# Altium PCB DSD_SDR_MainBoard_Single.PcbDoc
Units mm, origin at the board's own origin, x right, y up, seen from the top; angles counter-clockwise.
Board outline 82.81 x 31.5 mm, 2 copper layers (Top Layer, Bottom Layer), stack 1.669 mm thick; 8 components, 10 nets, 59 pads, 5 vias.
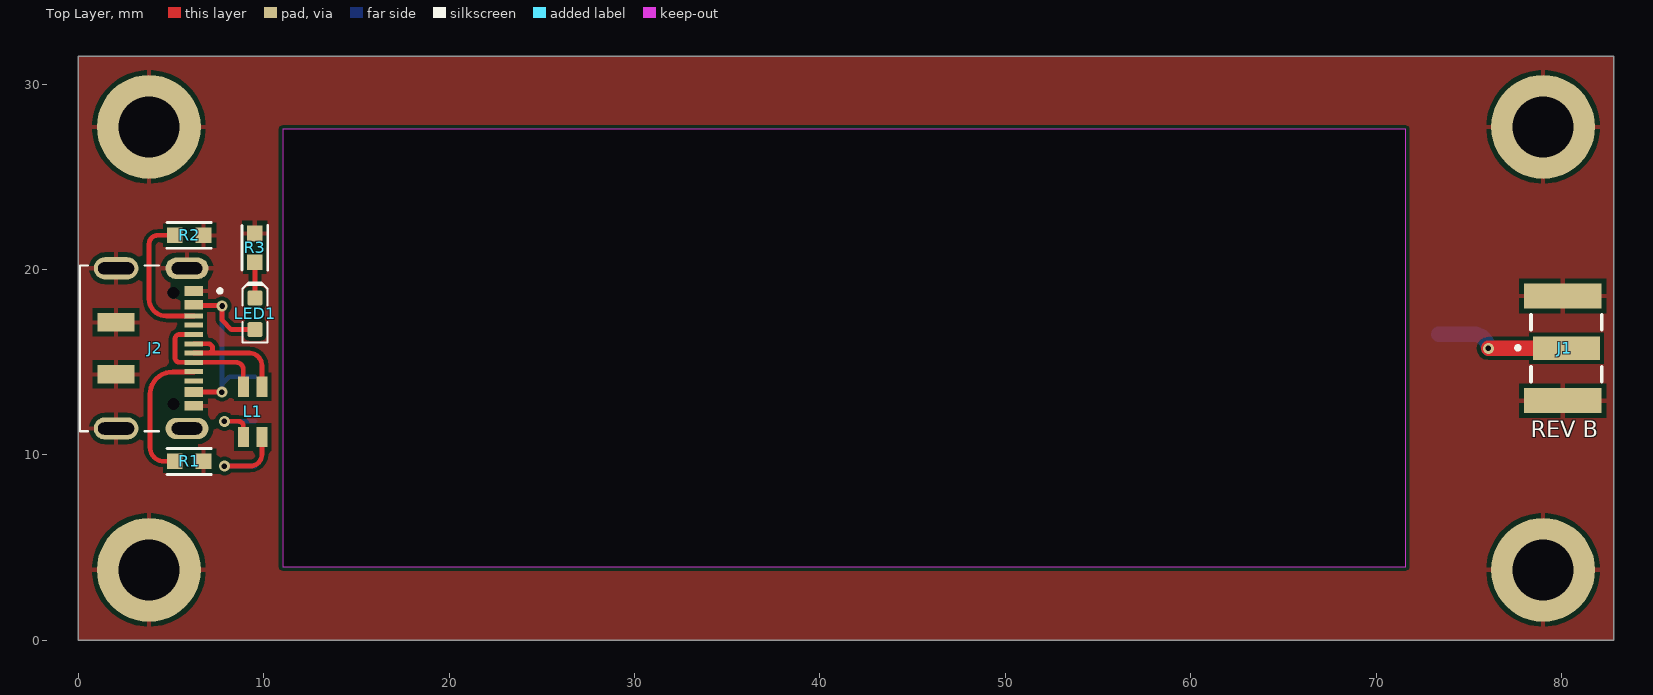
[diagram p0: Top Layer view]
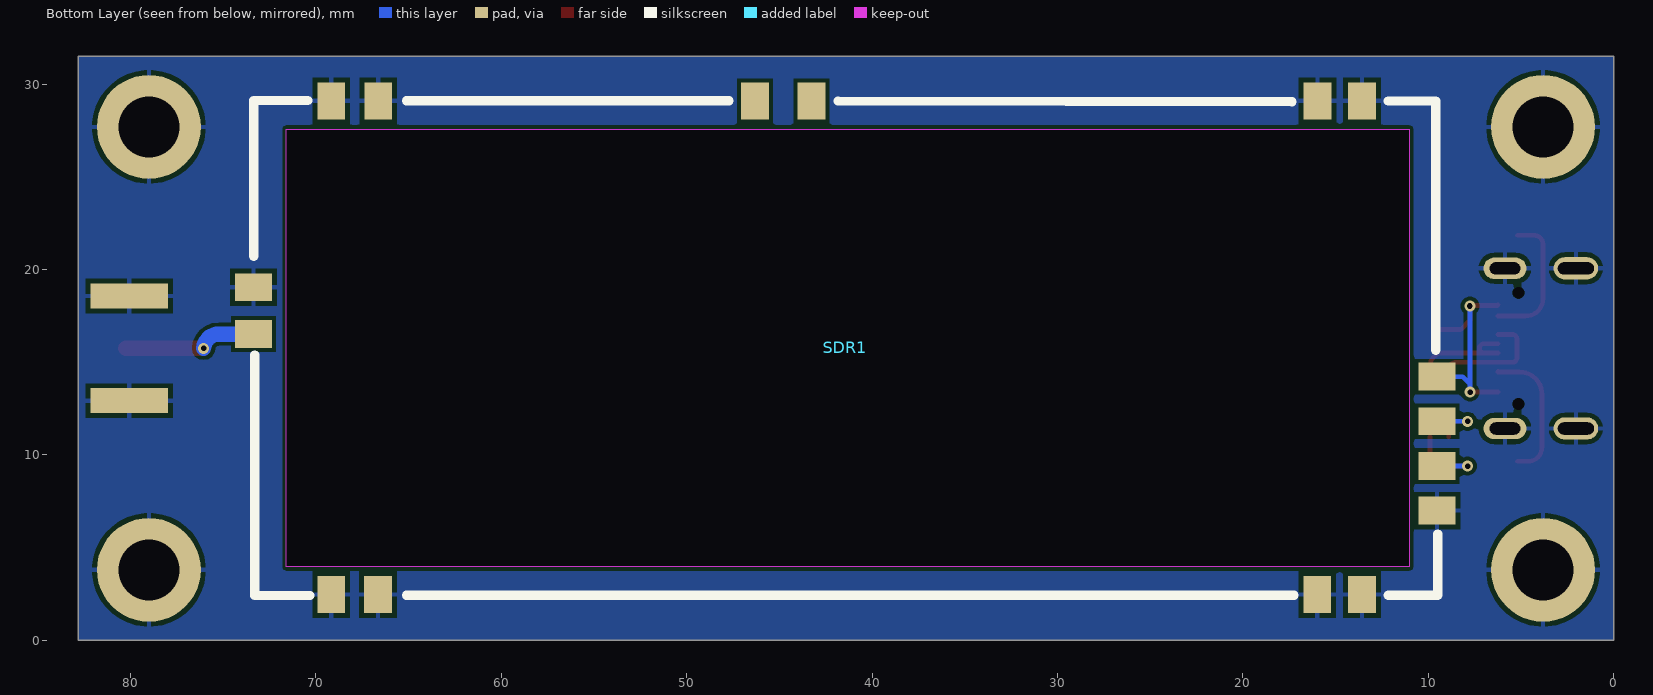
[diagram p1: Bottom Layer view, seen from below]
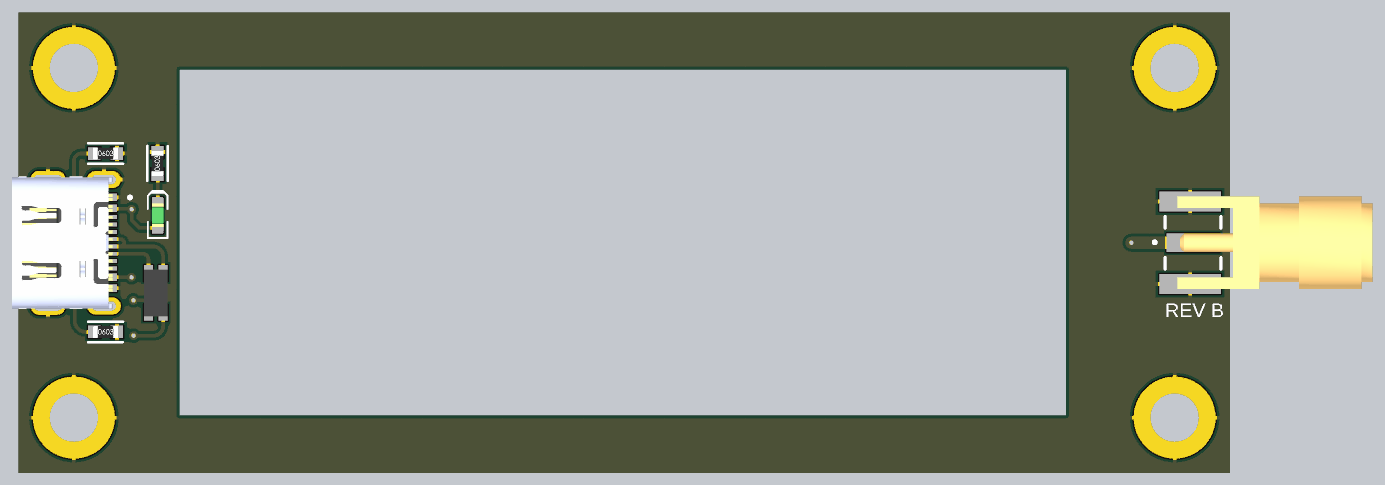
[diagram p2: 3D render of the assembled board from above, using the file's embedded part models]

## Layer stack, top to bottom
Top Solder: solder mask 0.0254, SM-001, Dk 4
Top Layer: signal copper 0.035
Dielectric 1: core 1.5986, Core-043, Dk 4.5
Bottom Layer: signal copper 0.035
Bottom Solder: solder mask 0.0254, SM-001, Dk 4

## Board outline
0,0 0,31.496 82.814,31.496 82.814,0

## Design rules (kind name [scope] priority, off if disabled: settings)
Clearance [All] p1: gap=0.2 ignorepadtopadclearanceinfootprint=FALSE except(0: Arc-Hole Track-Hole SMDPad-Hole THPad-Hole Via-Hole Fill-Hole Poly-Hole Region-Hole Text-Hole)
HoleSize [All] p1: absolutevalues=TRUE maxlimit=5 minlimit=0.025 maxpercent=80.000 minpercent=20.000
HoleToHoleClearance [All] p1: gap=0 allowstackedmicrovias=TRUE
MinimumSolderMaskSliver [All] p1: minsoldermaskwidth=0
PolygonConnect [All] p1: connectstyle=Relief reliefconductorwidth=0.254 reliefentries=4 polygonreliefangle="90 Angle" airgapwidth=0.254
RoutingVias [All] p1: holewidth=0.3 width=0.6 viastyle="Through Hole" minholewidth=0.3 minwidth=0.6 maxholewidth=4 maxwidth=6
SilkToSilkClearance [All] p1: silktosilkclearance=0
SilkToSolderMaskClearance [IsPad] p1: minsilkscreentomaskgap=0 clearancetoexposedcopper=TRUE
SolderMaskExpansion [All] p1: expansion=0.102 istentingtop=FALSE
SupplyNets "Schematic Supply Nets_1" [InNet('GND')] p1: voltage=0.000
SupplyNets "Schematic Supply Nets" [InNet('+5-USB')] p2: voltage=0.000
Width RF [InNet('RF')] p1: maxlimit=0.9 minlimit=0.826 preferedwidth=0.846 impedanceprofiledriven=TRUE impedanceprofileid={A931AD90-E5BE-4048-AE62-1A7E0EDC505E} impedanceprofilevalue=50.000000 minimp=50.000000 maximp=50.000000 favimp=50.000000
Width [All] p2: maxlimit=0.254 minlimit=0.254 preferedwidth=0.254
25 further rules are at their usual default settings.

## Components (designator, comment, footprint, x,y, rotation, side; value= is the part's Value field where it differs from the comment)
J1 "SMA-J-P-H-ST-EM1" SAMTEC_SMA-J-P-H-ST-EM1 80.274,15.748 r90 top locked
J2 "DX07S016JA1R1500" JAE_DX07S016JA1R1500 5.132,15.745 r270 top locked
L1 "90Ohm" WE-CNSW_1206 9.398,12.319 r270 top
LED1 "Green" LED-0603-GREEN 9.525,17.614 r90 top
R1 "5.1k" SMD-0603-RES 5.969,9.652 r270 top
R2 "5.1k" SMD-0603-RES 5.969,21.844 r270 top
R3 "5.1k" SMD-0603-RES 9.515,21.175 r0 top
SDR1 "SDR_Module" SDR 13.552,2.432 r90 top locked

## Footprints (in the part's own frame and the unit in brackets; to place one, negate y for a bottom-side part, rotate by r counter-clockwise, add the part's x,y. Pads: shape width x height; smd on the part's side, far side on the other; paste and mask are expansions set on the pad)
JAE_DX07S016JA1R1500 [mm]
  rect 0.52x1 smd: 1(-3.1,1.1) 2(-2.35,1.1) 11(2.35,1.1) 12(3.1,1.1)
  rect 0.27x1 smd: 3(-1.75,1.1) 4(-1.25,1.1) 5(-0.75,1.1) 6(-0.25,1.1) 7(0.25,1.1) 8(0.75,1.1) 9(1.25,1.1) 10(1.75,1.1)
  rect 1x2 smd: S1(-1.4,-3.1) S2(1.4,-3.1)
  oval 1.158x2.316 hole 0.65 slot 1.65 at 90 deg: S3(-4.32,0.725) S4(4.32,0.725)
  oval 1.2x2.4 hole 0.65 slot 1.95 at 90 deg: S5(-4.32,-3.1) S6(4.32,-3.1)
  round 0 / inner round 0.63 / far side round 0 hole 0.63 unplated: USB1(-3,0) USB2(3,0)
  round 0 / inner round 0.6 / far side round 0 hole 0.6 unplated: USB3(3,0)
  silkscreen extent -4.47,-5.05 4.47,2.6, body extent -4.46,-5.58 4.48,1.32, height 3.31
LED-0603-GREEN [mm]
  round 0.254 on Mech15: 0(0,0)
  rrect25% 0.8x0.8 smd: A(-0.85,0) K(0.85,0)
  Top Layer pour cut-out: -0.5,0.5 0.5,0.5 0.5,-0.5 -0.5,-0.5
  silkscreen extent -1.55,-0.67 1.68,0.67, body extent -0.8,-0.4 0.8,0.4, height 0.75
SAMTEC_SMA-J-P-H-ST-EM1 [mm]
  rect 1.27x3.6 smd: 1(0,0)
  rect 1.35x4.2 smd: 2_1(-2.825,0.2) 3_1(2.825,0.2)
  rect 1.35x4.2 smd far side: 2_2(-2.825,0.2) 3_2(2.825,0.2)
  silkscreen extent -1.8,-1.9 1.8,2.72, body extent -3.17,-12.25 3.18,1.08, height 3.55
SDR [mm]
  rect 1.5x2 smd far side: 1(11.792,4.027) 2(6.972,4.027) 3(9.382,4.027) 4(4.562,4.027) 4(16.615,-59.816) 7(14.085,-59.816)
  rect 2x1.5 smd far side: 4(0.037,-0.019) 4(0.037,-2.429) 4(0.037,-53.105) 4(0.037,-55.626) 4(26.67,-2.423) 4(26.67,-0.013) 4(26.67,-55.626) 4(26.67,-53.086) 5(26.67,-29.718) 6(26.67,-32.766)
  Keep-Out Layer board cut-out: 25.146,-58.039 25.146,2.54 1.524,2.54 1.524,-58.039
SMD-0603-RES [mm]
  rect 0.85x0.85 smd: 1(0,0.775) 2(0,-0.775)
  silkscreen extent -0.7,-1.2 0.7,1.2, body extent -0.4,-0.85 0.4,0.85, height 0.56
WE-CNSW_1206 [mm] "SMT Common Mode Line Filter, 4-leads, body 3.20x1.60mm"
  rect 1.1x0.6 smd: 1(-1.35,0.5) 2(1.35,0.5) 3(1.35,-0.5) 4(-1.35,-0.5)
  body extent -1.6,-0.8 1.6,0.8, height 1.8

## Part data
J1: "SMA Connector Jack, Female Socket 50Ohm Board Edge, End Launch Solder", Package=None, Availability=Unavailable, MF=Samtec, MP=SMA-J-P-H-ST-EM1, Price=None
J2: "USB-C (USB TYPE-C) USB 2.0 Receptacle Connector 24 (16+8 Dummy) Position Surface Mount, Right Angle; Through Hole", Package=None, Availability=Unavailable, MP=DX07S016JA1R1500, Price=None
L1: library part 744232090, "WE-CNSW SMT Common Mode Line Filter, size 1206, 90Ohm, 0.111uH, 50V", Case/Size Code=1206, DC Resistance Max=0.3Ohm, Inductance=0.111uH, Insulation Test Voltage=125VAC, Manufacturer="Wurth Elektronik", Operating Temperature Max=125°C, Operating Temperature Min=-40°C, Rated Current=0.37A, Rated Voltage=50V, Category="Common Mode Chokes", ComponentLink1Description="Manufacturer Link", ComponentLink1URL=https://www.we-online.com/redexpert/article/744232090?ad, ComponentLink2Description=Datasheet, ComponentLink2URL=https://www.we-online.com/redexpert/spec/744232090?ad, Height=1.8mm, Impedance @100MHz=90Ohm, Length=3.2mm, Manufacturer Part Number=744232090, Match Code=WE-CNSW, Mount="Surface Mount", Packaging="Tape and Reel", Width=1.6mm, Winding Style=bifiliar
LED1: library part LED_SMD_Green_0603_570nm, "LED 0603 SMD Green 570nm 50mcd 20mA", Current - Test=20mA, Manufacturer 1="Kingbright Company LLC", Manufacturer Part Number 1=APT1608CGCK, Package / Case="0603 (1608 metric)", Ratings="20mcd min; 50 mcd typ; 570 nm", Supplier Part Number 1=754-1116-1-ND, Voltage - Forward (Vf) @ 10mA=2.0V, Voltage - Forward (Vf) Typ=2.1V, Color=Green, ComponentLink1Description=http://www.us.kingbright.com/images/catalog/SPEC/APT1608CGCK.pdf, ComponentLink1URL=http://www.us.kingbright.com/images/catalog/SPEC/APT1608CGCK.pdf, Lens Style/Size="Rectangle with Flat Top, 1.1mm x 0.8mm", Lens Type=Clear, Material=AlGaInP, RoHS 1="RoHS Compliant", SCDType=source, Supplier 1=Digi-Key, Viewing Angle=120°, Wavelength - Dominant=570nm, Wavelength - Peak=574nm
R1 R2 R3: library part ERJ-3EKF5101V, "RES SMD 5.1K OHM 1% 1/10W 0603", Digi-Key Part Number=P5.10KHCT-ND, Manufacturer="Panasonic Electronic Components", Operating Temperature="-55°C ~ 155°C", Package / Case="0603 (1608 Metric)", Power (Watts)="0.1W, 1/10W", Supplier Device Package=0603, Temperature Coefficient=±100ppm/°C, Tolerance=±1%, @ qty=1500, Composition="Thick Film", Datasheets=http://industrial.panasonic.com/www-cgi/jvcr13pz.cgi?E+PZ+3+AOA0002+ERJ3EKF5101V+7+WW, Factory Stock=0, Failure Rate=-, Features="Automotive AEC-Q200", Height - Seated (Max)="0.022\" (0.55mm)", Image=//media.digikey.com/Photos/Panasonic%20Photos/MFG_ERJ-P6W%20Series.jpg, Minimum Quantity=1, Number of Terminations=2, Packaging="Cut Tape (CT)", Part Number=ERJ-3EKF5101V, Part Status=Active, Quantity Available=159646, Series=ERJ, Size / Dimension="0.063\" L x 0.031\" W (1.60mm x 0.80mm)", Unit Price (USD)=0.00379

## Free pads (board coordinates)
  round 5.6 hole 3.3: 4(3.8,3.8) 4(3.8,27.696) 4(79.014,3.8) 4(79.014,27.696)

## Via types
v1: diameter 0.6, hole 0.3, Top Layer to Bottom Layer, tented both sides, 5 vias

## Nets (pads, with @x,y where several pads share a name; then routed paths per layer and width w, separated by ;. In a path a pad name is that pad's centre, name@x,y a point inside that pad or via, vN(x,y) a via of type N, cw(c..) or ccw(c..) an arc to the next point about the centre after c; other vN are vias at no path point)
+5-USB: J2.2 J2.11 LED1.A SDR1.1 | length 12.4
  Top Layer w0.254: J2.11 6.605,13.389 v1(7.742,13.389) ; J2.2 6.262,18.065 7.716,18.065 v1(7.747,18.034) 7.747,17.272 8.255,16.764 LED1.A
  Bottom Layer w0.254: v1(7.742,13.389) 7.745,13.841 ; v1(7.747,18.034) 7.747,14.088 7.745,13.841 ; SDR1.1 8.128,14.224 7.745,13.841
GND: J1.2_1 J1.2_2 J1.3_1 J1.3_2 J2.1 J2.12 J2.S1 J2.S2 J2.S3 J2.S4 J2.S5 J2.S6 pad.4 R1.1 R2.1 R3.1 SDR1.4
NetJ2_3: J2.3 R2.2 | length 7.6
  Top Layer w0.254: R2.2 4.275,21.844 ccw(c4.275,21.379) 3.81,21.379 3.81,18.415 ccw(c4.73,18.415) 4.73,17.495 J2.3
NetJ2_5: J2.5 J2.8 L1.4 | length 7.2
  Top Layer w0.254: J2.5 5.446,16.495 ccw(c5.446,16.256) 5.207,16.256 5.207,15.24 ccw(c5.452,15.24) 5.452,14.995 J2.8 8.5,14.995 cw(c8.5,14.597) 8.898,14.597 L1.4
NetJ2_6: J2.6 J2.7 L1.1 | length 6.8
  Top Layer w0.254: J2.7 6.986,15.495 ; J2.6 6.992,15.995 cw(c6.992,15.748) 7.239,15.748 cw(c6.986,15.748) 6.986,15.495 ; L1.1 9.898,14.826 ccw(c9.229,14.826) 9.229,15.495 6.986,15.495
NetJ2_9: J2.9 R1.2 | length 7.7
  Top Layer w0.254: R1.2 4.62,9.652 cw(c4.62,10.414) 3.858,10.414 3.858,13.256 cw(c5.08,13.256) 5.08,14.478 6.232,14.478 J2.9
NetLED1_K: LED1.K R3.2 | length 1.9
  Top Layer w0.254: R3.2 9.525,20.39 LED1.K
RF: J1.1 SDR1.7 | length 7.3
  Top Layer w0.826: v1(76.063,15.748) J1.1
  Bottom Layer w0.826: SDR1.7 75.241,16.517 cw(c75.239,15.691) v1(76.063,15.748)
SDR_D+_P: L1.2 SDR1.2 | length 5
  Top Layer w0.254: v1(7.874,9.398) 9.271,9.398 ccw(c9.271,10.025) 9.898,10.025 L1.2
  Bottom Layer w0.254: v1(7.874,9.398) 9.525,9.398 SDR1.2
SDR_D-_N: L1.3 SDR1.3 | length 3.4
  Top Layer w0.254: v1(7.874,11.811) 8.636,11.811 cw(c8.636,11.549) 8.898,11.549 L1.3
  Bottom Layer w0.254: v1(7.874,11.811) 7.874,11.814 SDR1.3
pads on no net: J2.4 J2.10 J2.USB1 J2.USB2 J2.USB3 LED1.0 SDR1.5 SDR1.6

## Polygon pours and split planes (outlines as drawn)
GND on Bottom Layer "GND_L02_P000" (solid, pour order 0): 0,0 0,31.496 82.814,31.496 82.814,0
GND on Top Layer "GND_L01_P001" (solid, remove dead copper, pour order 1): 0,0 0,31.496 82.814,31.496 82.814,0

## Silkscreen, mask and mechanical layers (free items; w line width, h text height)
Top Overlay:
  text "REV B" at 78.359,10.668 h1.52
Mechanical 1:
  the board outline again, w0.254